# EAGLE board ADXL345-BreakoutBoard-v10 (EAGLE 6.2)
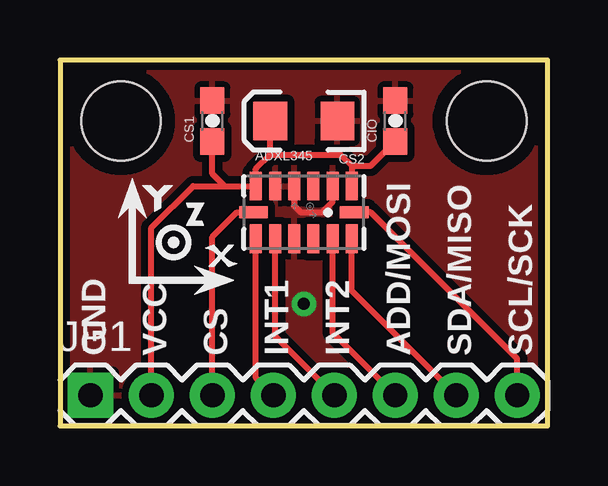
[diagram p0: board, top side]
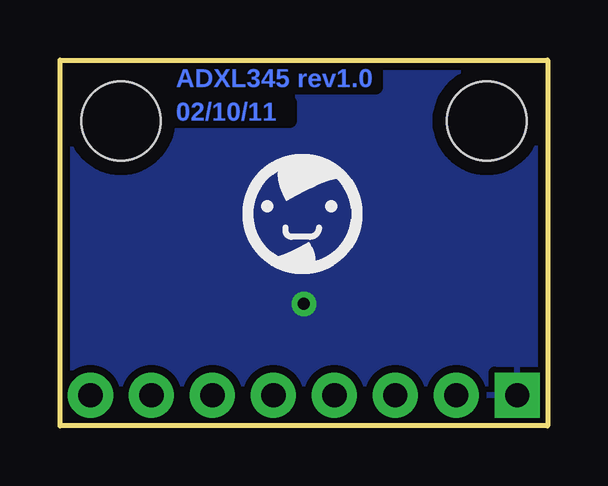
[diagram p1: board, bottom side, seen from below]

Size 20.32 x 15.24 mm. Coordinates in mm from the lower left corner, seen from the top.
Outline: 0,0 20.32,0 20.32,15.24 0,15.24 0,0
Copper layers (1*16): Top 0.035mm / dielectric 1.5mm / Bottom 0.035mm
Design rules: minimum track width 8mil, minimum drill 20mil, track to track 8mil, track to pad 8mil, pad to pad 8mil, via to via 8mil, smd to smd 8mil, copper to edge 8mil, drill to drill 8mil, minimum pad ring 12mil, minimum via ring 10mil, stop-mask expansion 4mil, vias tented up to drill 20mil, thermal gap 10mil

## Footprints (pad centres in the part's own frame; a part is rotated, then mirrored left to right if it is on the bottom)
LGA14 = smd 0.5 x 1.2: 1 2,1.1; 2 1.2,1.1; 3 0.4,1.1; 4 -0.4,1.1; 5 -1.2,1.1; 6 -2,1.1; 8 -2,-1.1; 9 -1.2,-1.1; 10 -0.4,-1.1; 11 0.4,-1.1; 12 1.2,-1.1; 13 2,-1.1 | smd 1.2 x 0.5: 7 -2.1,0; 14 2.1,0
0603-CAP = smd 1.1 x 1: 1 -0.85,0; 2 0.85,0
EIA3216 = smd 1.4 x 1.6: A 1.4,0; C -1.4,0
1X08 = drill 1.016 pad 1.88 square: 1 0,0 | drill 1.016 pad 1.88: 2 2.54,0; 3 5.08,0; 4 7.62,0; 5 10.16,0; 6 12.7,0; 7 15.24,0; 8 17.78,0
STAND-OFF = hole 3.302: 0,0

## Placement (x,y rotation side)
ADXL345  43001  [LGA14]  10.16,8.89 0 top
CIO  0.1uF  [0603-CAP]  13.97,12.7 90 top
CS1  0.1uF  [0603-CAP]  6.35,12.7 90 top
CS2  10uF  [EIA3216]  10.16,12.7 180 top
JP1  [1X08]  1.27,1.27 0 top
JP2  STAND-OFF  [STAND-OFF]  2.54,12.7 0 top
JP3  STAND-OFF  [STAND-OFF]  17.78,12.7 0 top
LOGO1  LOGO_5HZ_CIRC_COOPER_5MM  [5HZ_LOGO_CIRC_5MM]  12.7,6.35 0 bottom
U$2  EJES_CARTESIANO_5MM  [EJE_CARTESIANO_5MM]  2.41,5.46 0 top

## Library data of the parts
ADXL345 CIO CS1 CS2 JP1-JP3 = SparkFun
LOGO1 = 5hz-electronica
U$2 = PEDRO

## Nets
CS: ADXL345.7 JP1.3
GND: ADXL345.2 ADXL345.4 ADXL345.5 ADXL345.10 CIO.2 CS1.2 CS2.C JP1.1
INT1: ADXL345.8 JP1.4
INT2: ADXL345.9 JP1.5
SCL: ADXL345.14 JP1.8
SDA: ADXL345.13 JP1.7
SDO: ADXL345.12 JP1.6
VCC: ADXL345.1 ADXL345.6 CIO.1 CS1.1 CS2.A JP1.2

## Tracks (layer width: path | path; a pad name or v marks a point on that pad's centre or on a via)
CS
  Top 0.254: ADXL345.7 7.37,8.89 6.35,7.87 JP1.3
GND  (via drill 0.51)
  Top 0.254: ADXL345.2 11.36,9.33 10.92,8.89 10.03,8.89 9.76,9.16 ADXL345.4
  other vias: 10.16,5.08
  pour Top (isolate 0.305): 0,0 0,15.24 20.32,15.24 20.32,0
  pour Bottom (isolate 0.305): 0,0 0,15.24 20.32,15.24 20.32,0
INT1
  Top 0.254: ADXL345.8 8.16,2 JP1.4
INT2
  Top 0.254: ADXL345.9 8.96,3.74 JP1.5
SCL
  Top 0.254: ADXL345.14 12.95,8.89 19.05,2.79 JP1.8
SDA
  Top 0.254: ADXL345.13 12.16,5.62 JP1.7
SDO
  Top 0.254: ADXL345.12 11.36,3.88 JP1.6
VCC
  Top 0.254: 8.76,11.3 8.16,10.7 ADXL345.6 6.86,9.99 | 8.76,11.3 CS2.A | 8.76,11.3 11.69,11.3 12.16,10.83 | 12.16,10.83 ADXL345.1 | JP1.2 3.81,8.26 5.54,9.99 6.86,9.99 | CS1.1 6.35,10.5 6.86,9.99 | 12.16,10.83 12.95,10.83 CIO.1

## Text on the board
Bottom: ADXL345 rev1.0 | 02/10/11
tPlace: GND | VCC | CS | INT1 | INT2 | ADD/MOSI | SDA/MISO | SCL/SCK
tNames: J. Lindblom